# Altium PCB Flashlight_FINAL.PcbDoc
Units mil, origin at the board's own origin, x right, y up, seen from the top; angles counter-clockwise.
Board outline 2862.27 x 1332.27 mil, 2 copper layers (Top Layer, Bottom Layer); 11 components, 6 nets, 31 pads, 7 vias.
Unrouted connection lines stored in the file: 1.
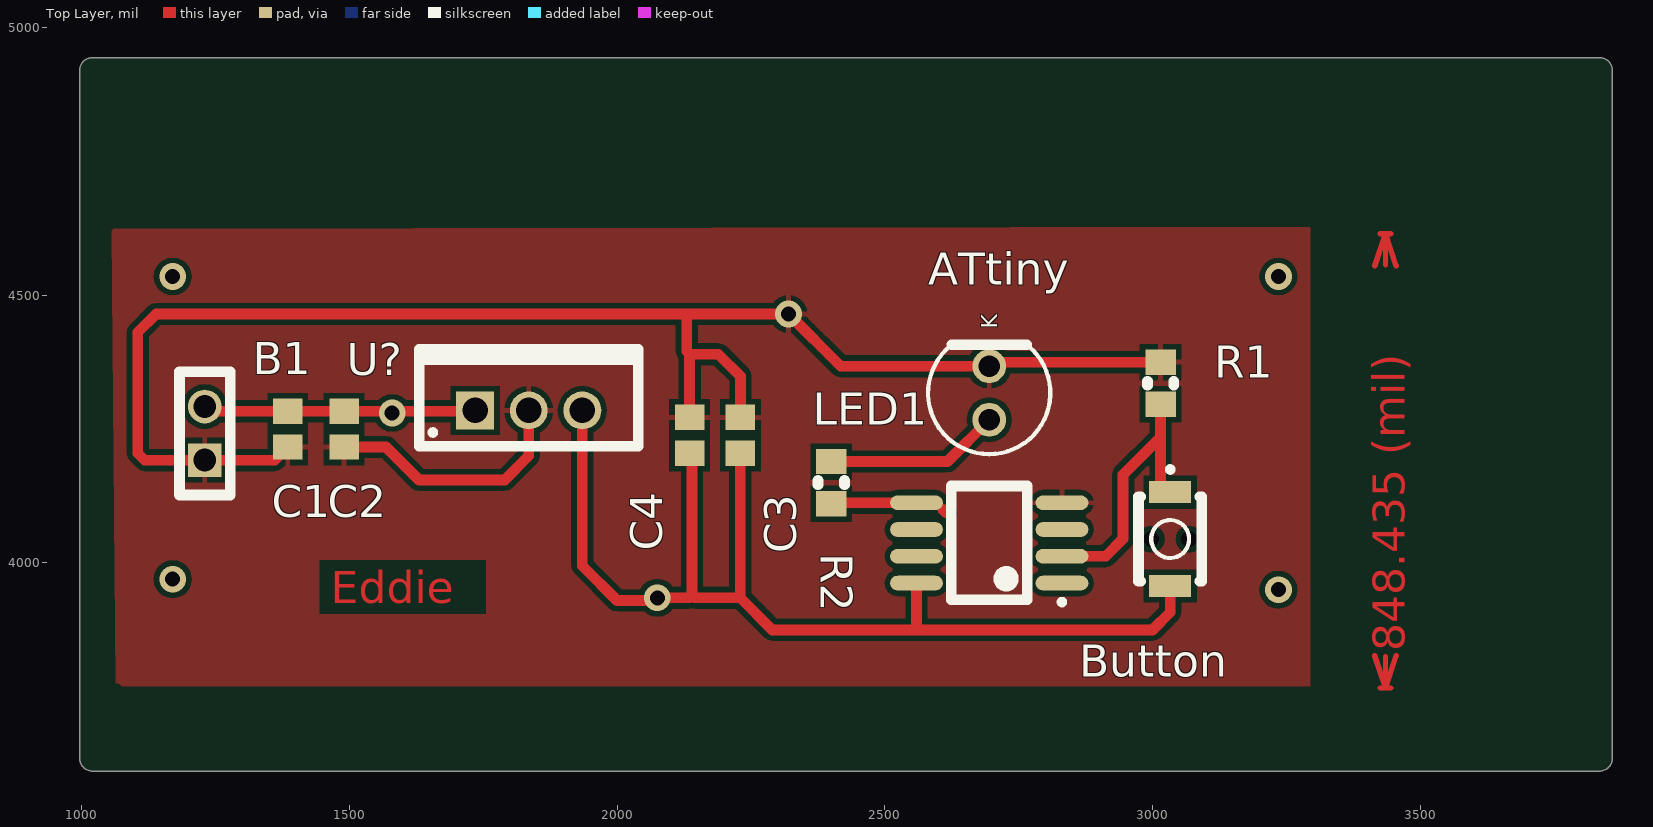
[diagram p0: Top Layer view]
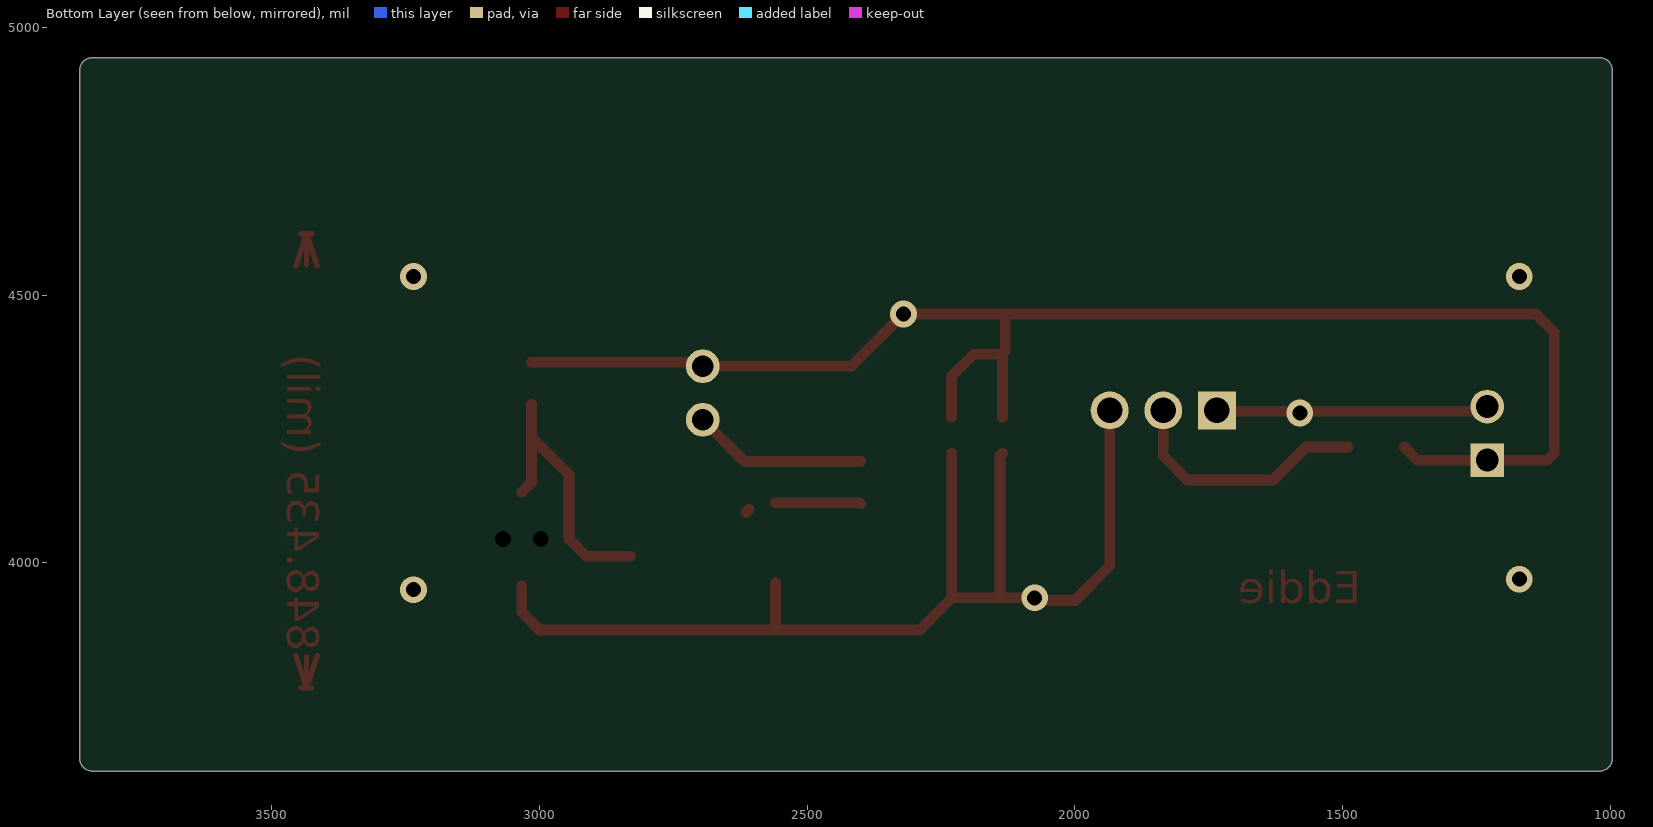
[diagram p1: Bottom Layer view, seen from below]

## Layer stack, top to bottom
Top Solder: solder mask 0.4, Solder Resist, Dk 3.5
Top Layer: signal copper 1.4
Dielectric 1: dielectric 12.6, FR-4, Dk 4.8
Bottom Layer: signal copper 1.4
Bottom Solder: solder mask 0.4, Solder Resist, Dk 3.5

## Board outline
1020,3611.36 cw(c1020,3635) 996.36,3635 996.36,4920 cw(c1020,4920) 1020,4943.64 3835,4943.64 cw(c3835,4920) 3858.64,4920 3858.64,3635 cw(c3835,3635) 3835,3611.36

## Design rules (kind name [scope] priority, off if disabled: settings)
Clearance [All] p1: gap=10 ignorepadtopadclearanceinfootprint=FALSE except(0: Arc-Hole Track-Hole SMDPad-Hole THPad-Hole Via-Hole Fill-Hole Poly-Hole Region-Hole Text-Hole)
PolygonConnect [All] p1: connectstyle=Relief reliefconductorwidth=10 reliefentries=4 polygonreliefangle="90 Angle" airgapwidth=10
RoomDefinition FlashLight_Circuit [InComponentClass('FlashLight_Circuit')] p1: confinementstyle=ConfineIn formatcopy=TRUE lockcomponents=FALSE outline 0,0 2000,0 2000,1000 0,1000
RoutingVias [All] p1: holewidth=28 width=50 viastyle="Through Hole" minholewidth=28 minwidth=50 maxholewidth=28 maxwidth=50
SolderMaskExpansion [All] p1: expansion=4
Width [All] p1: maxlimit=30 minlimit=10 preferedwidth=20 minimp=50.000000 maximp=50.000000 favimp=50.000000
30 further rules are at their usual default settings.

## Components (designator, comment, footprint, x,y, rotation, side; value= is the part's Value field where it differs from the comment)
ATtiny "ATtiny85-20SU" 8S2_M 2695,4037.45 r180 top (schematic designator U?)
B1 "Battery Connector" SMTC-PHF-102-01-X-S-002 1230,4192.05 r90 top
Button "TVAF06" JNFU-TVAF06_V 3032.89,4044.66 r270 top
C1 "0.1 uF" CAPC2013X135X45NL10T25 1385,4250 r90 top
C2 "10uF" CAPC2013X135X45NL10T25 1490,4250 r90 top
C3 "0.1uF" CAPC2013X135X45NL10T25 2230.39,4238.43 r270 top
C4 "10uF" CAPC2013X135X45NL10T25 2135.39,4238.43 r270 top
LED1 "151053YS04500" "Type 5mm" 2695,4317.4 r90 top
R1 "10K Ohm" RESC2013X60X35ML10T20 3015,4335.63 r270 top
R2 "300 Ohm" RESC2013X60X35ML10T20 2400,4150 r90 top
U? "L7805ABP" TO220FP 1835,4285 r0 top

## Footprints (in the part's own frame and the unit in brackets; to place one, negate y for a bottom-side part, rotate by r counter-clockwise, add the part's x,y. Pads: shape width x height; smd on the part's side, far side on the other; paste and mask are expansions set on the pad)
8S2_M [mm] "SOP, 8-Leads, Body 5.3x5.3mm, Pitch 1.27mm, IPC Low Density"
  oval 2.5x0.7 smd: 1(-3.45,1.905) 2(-3.45,0.635) 3(-3.45,-0.635) 4(-3.45,-1.905) 5(3.45,-1.905) 6(3.45,-0.635) 7(3.45,0.635) 8(3.45,1.905)
  silkscreen extent -3.57,-2.7 1.8,2.93, body extent -2.7,-2.68 2.7,2.68, height 2.16
CAPC2013X135X45NL10T25 [mm] "Chip Capacitor, 2-Leads, Body 2.00x1.25mm, IPC Medium Density"
  rect 1.2x1.4 smd: 1(-0.85,0) 2(0.85,0)
  body extent -1.05,-0.67 1.05,0.67, height 1.35
JNFU-TVAF06_V [mm] "Switch, Push Button, SMD, 2-Leads, Body 3x4mm"
  rect 1.05x2 smd: 1(-2.225,0) 2(2.225,0)
  round 0.4 hole 0.75 unplated: MH1(0,0.9) MH2(0,-0.9)
  silkscreen extent -3.42,-1.5 2,1.5, body extent -2,-1.5 2,1.5, height 2
RESC2013X60X35ML10T20 [mm] "Chip Resistor, 2-Leads, Body 2.00x1.25mm, IPC Low Density"
  rect 1.2x1.45 smd: 1(-1,0) 2(1,0)
  silkscreen extent -0.1,-0.63 0.1,0.63, body extent -1.05,-0.67 1.05,0.67, height 0.6
SMTC-PHF-102-01-X-S-002 [mm] "Press Fit Socket Assembly, 1x2 Pins, Vertical, 2.54mm Pitch, Female"
  rect 1.6x1.6 hole 1.081: 1(0,0)
  round 1.6 hole 1.081: 2(2.54,0)
  silkscreen extent -1.65,-1.2 4.19,1.2, body extent -1.52,-1.21 4.06,1.21, height 8.51
TO220FP [mm] "TO, Thru-Hole, Vertical, Heatsink Mounted; 3 In-Line Leads; Pitch 2.54 mm"
  rect 1.8x1.8 hole 1.2: 1(-2.54,0)
  round 1.8 hole 1.2: 2(0,0) 3(2.54,0)
  silkscreen extent -5.2,-1.7 5.2,2.9, body extent -5.25,-1.75 5.25,2.95, height 20
"Type 5mm" [mm] "THT, LED-5mm, 2pin- Body 5.8mm"
  round 1.6 hole 1: 1(1.27,0) 2(-1.27,0)
  silkscreen extent -2.9,-2.9 2.29,2.9, body extent -2.9,-2.9 2.5,2.9, height 11.7

## Part data
ATtiny: library part CMP-0093-00173-2, "8-bit AVR Microcontroller, 20MHz, 2.7-5.5V, 8K Flash, 512 Bytes EEPROM, 512 Bytes SRAM, Industrial Grade (-40°C to 85°C), 8-Lead SOIC, Pb-Free", ComponentLink1Description="Manufacturer URL", ComponentLink1URL=http://www.atmel.com/, ComponentLink2Description="ATtiny25/45/85 Datasheet", ComponentLink2URL=http://www.atmel.com/dyn/resources/prod_documents/doc2586.pdf, ComponentLink3Description="ATtiny25/45/85 Summary", ComponentLink3URL=http://www.atmel.com/dyn/resources/prod_documents/2586S.pdf, DatasheetVersion="revN, Apr-2011", PackageReference=8S2, PackageVersion="revF, Apr-2008", RevisionNote="DatasheetVersion updated. URLs added."
B1: library part CMP-1023-00103-1, "Press Fit Socket, Through-hole, Vertical, -55 to 125 degC, 2.54 mm Pitch, 2-Pin, Female, RoHS", Manufacturer=Samtec, PartNumber=PHF-102-01-L-S-002, Temperature Range="-55 to 125 degC", ComponentLink1Description="Manufacturer URL", ComponentLink1URL=http://www.samtec.com, ComponentLink2Description=Datasheet, ComponentLink2URL=http://www.samtec.com/documents/webfiles/pdf/phf.pdf, ComponentLink3Description="Package Specification", ComponentLink3URL=http://www.samtec.com/documents/webfiles/cpdf/PHF-1XX-XX-X-X-XXX-MKT.pdf, DatasheetVersion=F-214, Mounting Technology=Through-hole, Orientation=Vertical, PackageDescription=".100 Press Fit Socket Assembly", PackageReference=PHF-102-01-X-S-002, PackageVersion="F, 9/2009", Pitch="2.54 mm", RoHS=True
Button: library part CMP-0587-00001-1, "Switch, SPST Push Button, 50 mA, 12 V DC, SMD, -30 to 85 degC, RoHS", Contact Resistance="100 mW max", Dielectric Strength="250 V AC for 1 min", Insulation Resistance="100 MW min. 100 V DC", Manufacturer=Jianfu, Operating Temperature="-30 to 85 degC", Rating="50 mA. 12 V DC", ComponentLink1Description="Manufacturer URL", ComponentLink1URL=http://www.jian-fu.com/, ComponentLink2Description=Datasheet, ComponentLink2URL=http://en.jian-fu.com/product-22.html, Lifetime="100000 Cycles min", Mounting Technology="Surface Mount", PackageDescription="2-Pin Switch, Push Button, SMD, Body 2.9 x 3.9 mm", PackageReference=TVAF06, PartNumber=TVAF06, RoHS=TRUE, Travel="0.13 +/- 0.05 mm"
C1 C2 C3 C4: library part CMP-2007-03551-1, Manufacturer=Murata, Part Number=GRM21BR71A105KA01L
LED1: library part CMP-1477-00001-1, "THT LED round mono-color waterclear, WL-TMRW, Yellow", Emitting color=Yellow, Manufacturer="Wuerth Elektronik", ComponentLink1Description="Manufacturer URL", ComponentLink1URL=http://www.we-online.com, ComponentLink2Description=Datasheet, ComponentLink2URL=http://katalog.we-online.de/pbs/datasheet/7448042001.pdfhttp://katalog.we-online.de/pbs/datasheet/7448042001.pdfhttp://katalog.we-online.de/pbs/datasheet/7448042001.pdfhttp://katalog.we-online.de/pbs/datasheet/151053YS04500.pdf, PackageReference="Type 5mm", PartNumber=151053YS04500
R1 R2: library part CMP-2001-01354-1, Manufacturer=Yageo, Part Number=RC0805JR-07200RL
U?: library part CMP-0244-00479-1, "Positive Voltage Regulator, 5V, 3-Pin TO-220FP", ComponentLink1Description="Manufacturer URL", ComponentLink1URL=http://www.st.com, ComponentLink2Description=Datasheet, ComponentLink2URL=http://www.st.com/internet/com/TECHNICAL_RESOURCES/TECHNICAL_LITERATURE/DATASHEET/CD00000444.pdf, DatasheetVersion=16/11/2011, PackageDescription="TO, Thru-Hole, Vertical, Heatsink Mounted; 3 In-Line Leads; Pitch 2.54 mm", PackageReference=TO220FP, PackageVersion=2011

## Via types
v1: diameter 50, hole 28, Top Layer to Bottom Layer, 7 vias

## Nets (pads, with @x,y where several pads share a name; then routed paths per layer and width w, separated by ;. In a path a pad name is that pad's centre, name@x,y a point inside that pad or via, vN(x,y) a via of type N, cw(c..) or ccw(c..) an arc to the next point about the centre after c; other vN are vias at no path point)
+5: ATtiny.8 Button.2 C3.2 C4.2 U?.3 | length 2143.1
  Top Layer w20: U?.3 1935,3995 2000,3930 2070,3930 v1(2075,3935) 2135,3935 2140,3940 ; C4.2 2140,4200.35 2140,3940 ; C3.2 2230,4204.57 2230,3935 ; ATtiny.8 2559.17,3879.17 2555,3875 ; 2608.35,4100 2614.17,4094.17 ; Button.2 3032.89,3907.89 3000,3875 2555,3875 ; 2140,3940 2145,3935 2230,3935 ; 2230,3935 2290,3875 2555,3875
+9V: B1.2 C1.2 C2.2 U?.1 | length 509.2
  Top Layer w20: B1.2 1238.58,4283.46 C1.2 C2.2 1733.46,4283.46 U?.1
  other v1: 1580,4280
GND: ATtiny.4 B1.1 C1.1 C2.1 C3.1 C4.1 LED1.1 R1.1 U?.2 | length 3347.5
  Top Layer w20: C1.1 1360.51,4192.05 B1.1 1117.95,4192.05 1105,4205 1105,4430.9 1139.1,4465 2130,4465 ; C2.1 1568.46,4216.54 1630,4155 1790,4155 1835,4200 U?.2 ; C4.1 2135.39,4390 ; C3.1 2230.39,4348.78 2189.17,4390 2135.39,4390 ; R1.1 2702.6,4375 LED1.1 2417.6,4367.4 v1(2320,4465) 2130,4465 ; 2130,4465 2130,4395.39 2135.39,4390
NetATtiny_2: ATtiny.2 Button.1 R1.2 | length 518.1
  Top Layer w20: ATtiny.2 2912.45,4012.45 2945,4045 2945,4165 3015,4235 ; R1.2 3015,4235 ; Button.1 3015,4150.15 3015,4235
NetATtiny_5: ATtiny.5 R2.1 | length 159.9
  Top Layer w20: R2.1 2401.82,4112.45 ATtiny.5
NetLED1_2: LED1.2 R2.2 | length 327.3
  Top Layer w20: R2.2 2616.97,4189.37 LED1.2
pads on no net: ATtiny.1 ATtiny.3 ATtiny.6 ATtiny.7 Button.MH1 Button.MH2
copper on no net: | length 409.6
  Top Layer w10: 3415,3826.57 3435,3766.57 ; 3415,4555 3435,4615 ; 3425,3766.57 3445,3766.57 ; 3425,4615 3445,4615 ; 3435,3824.9 3435,3766.57 ; 3435,4556.67 3435,4615 ; 3455,3826.57 3435,3766.57 ; 3455,4555 3435,4615
  other v1: 3235,3950 1170,3969.75 1170,4535 3235.04,4535

## Polygon pours and split planes (outlines as drawn)
GND on Top Layer "Top Layer-GND" (solid, pour order 14): 1056.56,4624.17 1063.76,3770 3310,3770 3310,4628.17
no net on Top Layer "Top Layer-No Net" (solid, pour order 12): 2275,4620

## Other copper
Top Layer:
  text "Eddie" at 1465,3925 h60
  text "848.435 (mil)" at 3470.99,3834.9 h60 r90

## Dimensions
3310,4628.17 to 1063.76,3770 on Top Layer

## Text inside footprints (layer, text, board x,y; h text height)
LED1: Top Overlay "K" at 2710,4437.4 h30 r90; Mechanical 15 "K" at 2710,4437.4 h30 r90